# Altium PCB diffamp.PcbDoc
Units mil, origin at the board's own origin, x right, y up, seen from the top; angles counter-clockwise.
Board outline 900 x 1150.79 mil, 2 copper layers (Top Layer, Bottom Layer); 42 components, 33 nets, 125 pads, 42 vias.
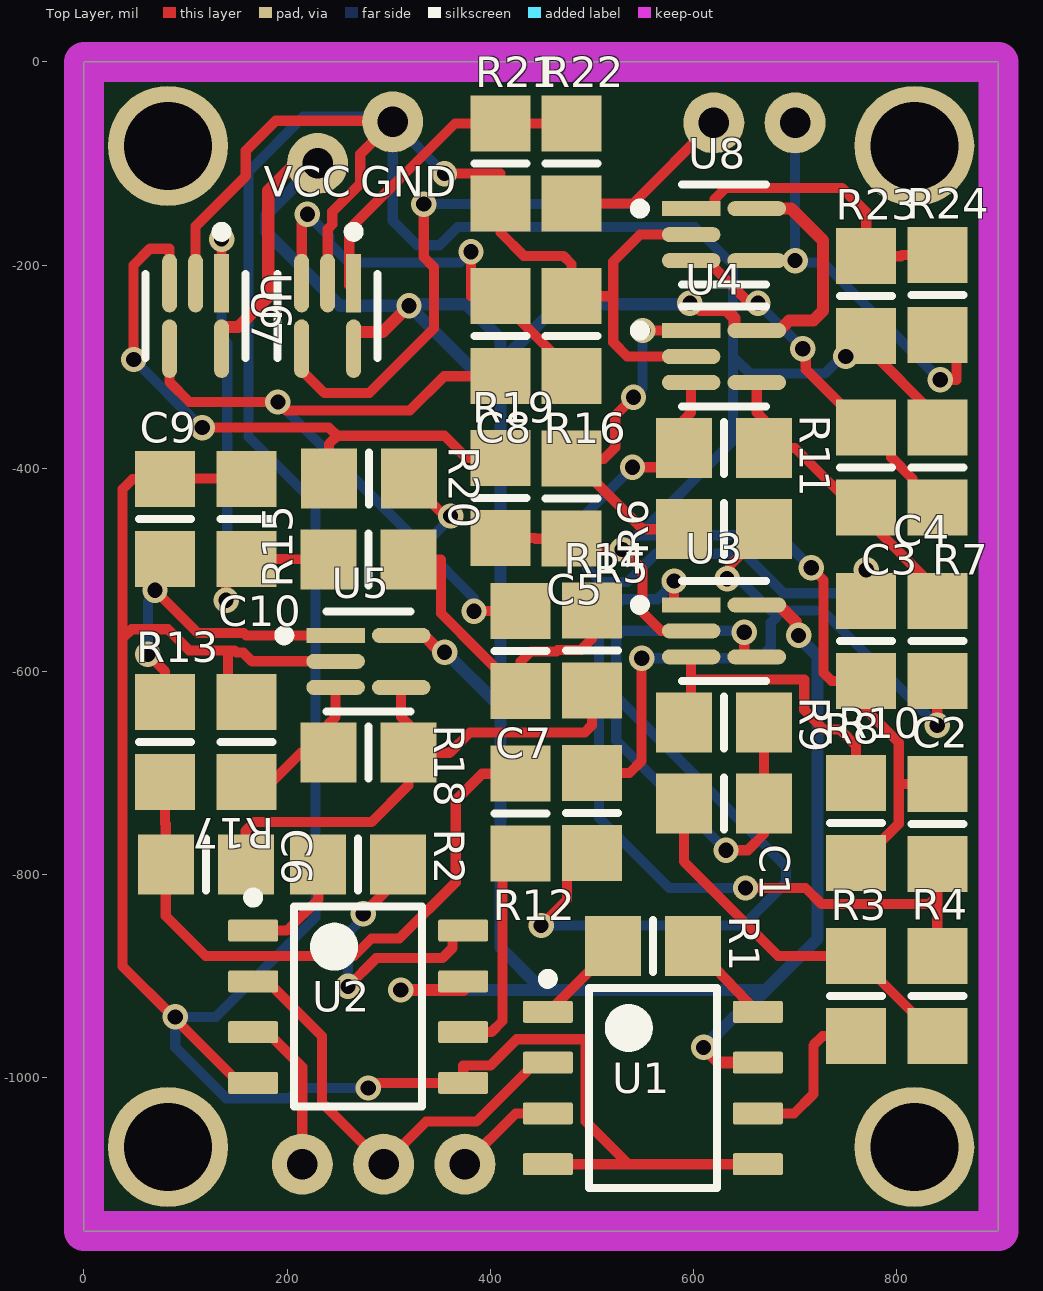
[diagram p0: Top Layer view]
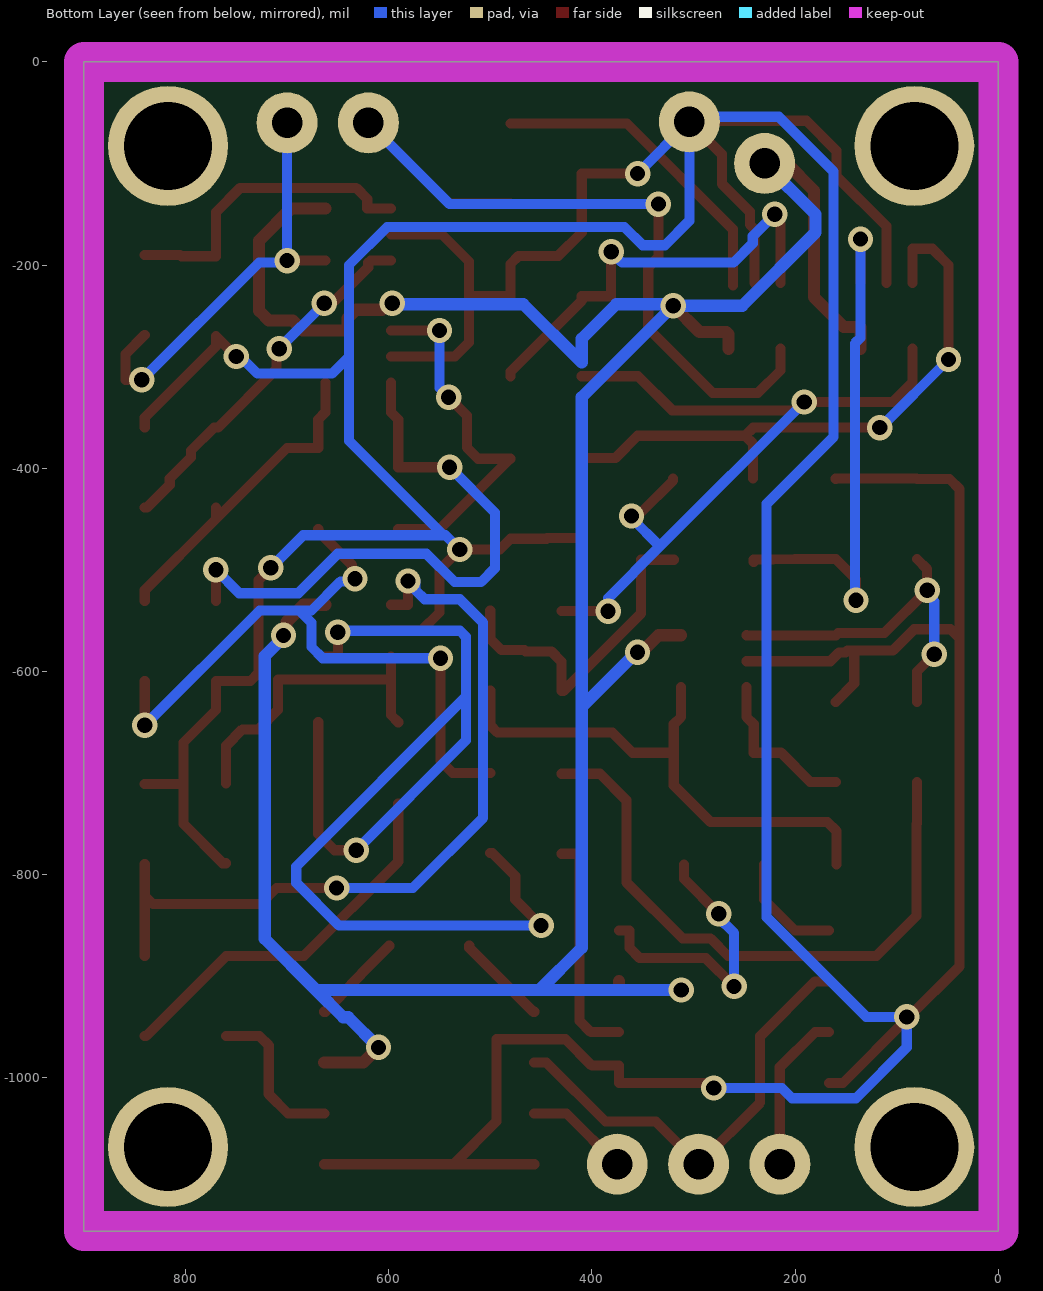
[diagram p1: Bottom Layer view, seen from below]

## Layer stack, top to bottom
Top Solder: solder mask 0.4, Solder Resist, Dk 3.5
Top Layer: signal copper 1.4
Dielectric 1: dielectric 12.6, FR-4, Dk 4.8
Bottom Layer: signal copper 1.4
Bottom Solder: solder mask 0.4, Solder Resist, Dk 3.5

## Board outline
0,-1150.79 900,-1150.79 900,0 0,0

## Design rules (kind name [scope] priority, off if disabled: settings)
Clearance [All] p1: gap=7 ignorepadtopadclearanceinfootprint=FALSE except(0: Arc-Hole Track-Hole SMDPad-Hole THPad-Hole Via-Hole Fill-Hole Poly-Hole Region-Hole Text-Hole; 5: SMDPad-SMDPad)
PolygonConnect [All] p1: connectstyle=Relief reliefconductorwidth=10 reliefentries=4 polygonreliefangle="90 Angle" airgapwidth=10
RoomDefinition diffamp [InComponentClass('diffamp')] p1: confinementstyle=ConfineIn formatcopy=TRUE lockcomponents=FALSE outline -97.64,-1226.38 1041.34,-1226.38 1041.34,92.91 -97.64,92.91
RoutingVias [All] p1: holewidth=15 width=25 viastyle="Through Hole" minholewidth=10 minwidth=20 maxholewidth=28 maxwidth=50
SolderMaskExpansion [All] p1: expansion=4 istentingtop=FALSE
Width [All] p1: maxlimit=20 minlimit=6 preferedwidth=10 minimp=50.000000 maximp=50.000000 favimp=50.000000
30 further rules are at their usual default settings.

## Components (designator, comment, footprint, x,y, rotation, side; value= is the part's Value field where it differs from the comment)
C1 "Cap" 6-0805_M 630,-730 r0 top value=1uF
C2 "Cap" 6-0805_M 840,-570 r90 top value=1uF
C3 "Cap" 6-0805_M 770,-399.37 r90 top value=1uF
C4 "Cap" 6-0805_M 840,-750 r90 top value=1uF
C5 "Cap" 6-0805_M 480,-430 r270 top value=1uF
C6 "Cap" 6-0805_M 120,-790 r0 top value=1uF
C7 "Cap" 6-0805_M 430,-580 r90 top value=1uF
C8 "Cap" 6-0805_M 410,-270 r90 top value=1uF
C9 "Cap" 6-0805_M 80,-450 r90 top value=1uF
C10 "Cap" 6-0805_M 160,-450 r90 top value=1uF
R1 "Res1" 6-0805_M 560,-870 r0 top value=5K
R2 "Res1" 6-0805_M 270,-790 r0 top value=5K
R3 "Res1" 6-0805_M 760,-919.37 r90 top value=330K
R4 "Res1" 6-0805_M 840,-919.37 r90 top value=330K
R5 "Res1" 6-0805_M 500,-739.37 r90 top value=330K
R6 "Res1" 6-0805_M 630,-460 r180 top value=330K
R7 "Res1" 6-0805_M 840,-399.37 r90 top value=1M
R8 "Res1" 6-0805_M 760,-749.37 r90 top value=10K
R9 "Res1" 6-0805_M 630,-650 r0 top value=100K
R10 "Res1" 6-0805_M 770,-570 r90 top value=10K
R11 "Res1" 6-0805_M 630,-380 r0 top value=100K
R12 "Res1" 6-0805_M 430,-740 r90 top value=330K
R13 "Res1" 6-0805_M 80,-669.37 r90 top value=330K
R14 "Res1" 6-0805_M 500,-579.37 r90 top value=330K
R15 "Res1" 6-0805_M 280,-490 r180 top value=330K
R16 "Res1" 6-0805_M 480,-270 r90 top value=1M
R17 "Res1" 6-0805_M 160,-669.37 r270 top value=10K
R18 "Res1" 6-0805_M 280,-680 r0 top value=100K
R19 "Res1" 6-0805_M 410,-429.37 r90 top value=10K
R20 "Res1" 6-0805_M 280.63,-410 r0 top value=100K
R21 "Res1" 6-0805_M 410,-100 r90 top value=10K
R22 "Res1" 6-0805_M 480,-100 r270 top value=100K
R23 "Res1" 6-0805_M 770,-230.63 r90 top value=10K
R24 "Res1" 6-0805_M 840,-229.37 r270 top value=100K
U1 "INA122UA" D0008A_L 560,-1010 r0 top
U2 "INA122UA" D0008A_L 270,-930 r0 top
U3 "LM321LVIDCKR" FP-DCK0005A-IPC_B 630,-560 r0 top
U4 "LM321LVIDCKR" FP-DCK0005A-IPC_B 630,-290 r0 top
U5 "LM321LVIDCKR" FP-DCK0005A-IPC_B 280,-590 r0 top
U6 "LM321LVIDCKR" FP-DCK0005A-IPC_B 110,-250 r270 top
U7 "LM321LVIDCKR" FP-DCK0005A-IPC_B 240,-250 r270 top
U8 "LM321LVIDCKR" FP-DCK0005A-IPC_B 630,-170 r0 top

## Footprints (in the part's own frame and the unit in brackets; to place one, negate y for a bottom-side part, rotate by r counter-clockwise, add the part's x,y. Pads: shape width x height; smd on the part's side, far side on the other; paste and mask are expansions set on the pad)
6-0805_M [mm] "Chip Resistor, Body 2.0x1.2mm, IPC Low Density"
  rect 1.4x1.5 smd: 1(-1,0) 2(1,0)
  silkscreen extent 0,-0.65 0,0.65, body extent -1.07,-0.7 1.07,0.7, height 0.7
D0008A_L [mm] "SOIC, 8-Leads, Body 5x4mm, Pitch 1.27mm, IPC High Density"
  rrect18% 1.25x0.55 smd: 1(-2.625,1.905) 2(-2.625,0.635) 3(-2.625,-0.635) 4(-2.625,-1.905) 5(2.625,-1.905) 6(2.625,-0.635) 7(2.625,0.635) 8(2.625,1.905)
  silkscreen extent -2.75,-2.5 1.6,2.85, body extent -3,-2.45 3,2.45, height 1.63
FP-DCK0005A-IPC_B [mm]
  rect 1.464x0.376 smd paste+0 mask+0: 1(-0.82,0.65)
  rrect100% 1.464x0.376 smd paste+0 mask+0: 2(-0.82,0) 3(-0.82,-0.65) 4(0.82,-0.65) 5(0.82,0.65)
  silkscreen extent -2.23,-1.25 1.05,1.25

## Part data
C1 C2 C3 C4 C5 C6 C7 C8 C9 C10: "Capacitor", LatestRevisionDate=17-Jul-2002, LatestRevisionNote="Re-released for DXP Platform.", PackageDescription="Radial Cap, Thru-Hole; 2 Leads; 0.3 in Pin Spacing", PackageReference=RAD-0.3, Published=8-Jun-2000, Publisher="Altium Limited"
R1 R2 R3 R4 R5 R6 R7 R8 R9 R10 R11 R12 R13 R14 R15 R16 R17 R18 R19 R20 R21 R22 R23 R24: "Resistor", LatestRevisionDate=17-Jul-2002, LatestRevisionNote="Re-released for DXP Platform.", PackageDescription="Axial Device, Thru-Hole; 2 Leads; 0.3 in Pin Spacing", PackageReference=AXIAL-0.3, Published=8-Jun-2000, Publisher="Altium Limited"
U1 U2: library part CMP-0944-00048-2, "Single Supply, MicroPower Instrumentation Amplifier, -40 to 85 degC, 8-pin SOIC (D8), Green (RoHS & no Sb/Br)", Input Bias Current (+/-)(Max)(nA)=50, Manufacturer="Texas Instruments", Quiescent Current (+/-)(Typ)(mA)=0.06, CMRR(Min)(dB)=76, Code_JEDEC=MS-012, ComponentLink1Description="Manufacturer URL", ComponentLink1URL=http://www.ti.com/, ComponentLink2Description=Datasheet, ComponentLink2URL=http://www.ti.com/general/docs/lit/getliterature.tsp?genericPartNumber=INA122&fileType=pdf, ComponentLink3Description="Package Specification", ComponentLink3URL=http://www.ti.com/litv/pdf/msoi002j, DatasheetVersion=SBOS069, Eco-Plan="Green (RoHS & no Sb/Br)", Gain(V/V)="5 to 10000", Input Offset (+/-)(Max)(uV)=500, Input Offset Drift (+/-)(Max)(uV/Degrees Celsius)=5, Mounting Technology="Surface Mount", Noise at 1kHz(Typ)(nV/rt(Hz))=60, Non-Linearity (+/-)(Max)(%)=0.024, Number of Channels=1, PackageDescription="8-Pin Plastic Small Outline, Body 4.9 x 3.9 mm, Pitch 1.27 mm", PackageReference=D0008A, PackageVersion="4040047-3/M, 06/2011", PartNumber=INA122UA, SubFamily="Single Supply", Vs(Max)(V)=36, Vs(Min)(V)=2.2
U3 U4 U5 U6 U7 U8: library part CMP-04895-000147-1, "IC OPAMP GP 1 CIRCUIT SC70-5", RoHS Compliant=Yes

## Free pads (board coordinates)
  round 118.11 hole 86.61: 15(82.68,-82.68) 16(817.32,-82.68) 17(82.68,-1068.11) 18(817.32,-1068.11)
  round 60 hole 30: 19(230,-100) 20(304,-59) 23(215,-1085) 24(295,-1085) 25(375,-1085) 26(620,-60) 27(700,-60)

## Via types
v1: diameter 25, hole 15, Top Layer to Bottom Layer, 42 vias

## Nets (pads, with @x,y where several pads share a name; then routed paths per layer and width w, separated by ;. In a path a pad name is that pad's centre, name@x,y a point inside that pad or via, vN(x,y) a via of type N, cw(c..) or ccw(c..) an arc to the next point about the centre after c; other vN are vias at no path point)
GND: C4.2 C5.2 C9.2 C10.2 pad.20 R7.2 R8.1 R10.1 R16.2 R17.1 R19.1 R21.1 R23.1 U1.4 U1.5 U2.4 U2.5 U3.2 U4.2 U5.2 U6.2 U7.2 U8.2 | length 5988.4
  Top Layer w10: U6.2 110,-161.85 159.37,-112.48 159.37,-87.36 188.73,-58 304,-58 pad.20 272,-91 272,-120 244.5,-147.5 244.5,-160.15 240,-164.65 240,-217.78 U7.2@237.78,-220 ; 139.2,-579.2 141.77,-581.77 141.77,-611.77 R17.1 ; C10.2 160,-410 80.63,-410 C9.2 48,-410.63 38,-420.63 38,-567.5 ; U2.4 152.87,-1005 90,-942.13 v1(90,-940) 87.88,-940 38,-890.12 38,-567.5 ; U5.2 165.35,-590 156.85,-581.5 150.46,-581.5 148.16,-579.2 103.46,-579.2 82.75,-558.5 47,-558.5 38,-567.5 ; v1(280,-1010) 284.06,-1010 289.06,-1005 U2.5 373.35,-988 400,-988 426,-962 494,-962 494,-1043 536,-1085 ; v1(355,-110) 410,-110 R21.1 410,-168 433,-191 472,-191 480,-199 R16.2 521,-230.63 ; R19.1 444,-468.74 444.63,-469.37 C5.2 490.63,-480 v1(530,-480) 550,-500 550,-542 568,-560 U3.2 ; U1.4 536,-1085 ; U4.2 534.89,-290 521,-276.11 521,-230.63 ; U8.2 547.47,-170 521,-196.47 521,-230.63 ; U1.5 536,-1085 ; v1(716,-498) 728,-510 728,-601.37 736,-609.37 R10.1 770,-638 802,-670 802,-710.63 ; v1(750,-290) R23.1 770,-280 840,-350 R7.2 ; R8.1 763.26,-788.74 802,-750 802,-710.63 ; C4.2 802,-710.63
  Bottom Layer w10: v1(280,-1010) 212.97,-1010 202.97,-1020 140,-1020 90,-970 v1(90,-940) 130,-940 228,-842 228,-435 162,-369 162,-108 216,-54 299,-54 pad.20 ; v1(355,-110) pad.20 ; v1(530,-480) 544,-466 ; v1(716,-498) 684,-466 546,-466 639,-373 639,-290 ; v1(750,-290) 745.94,-290 729.12,-306.82 655.82,-306.82 639,-290 ; pad.20 304,-156.5 328,-180.5 350,-180.5 368,-162.5 601.5,-162.5 639,-200 639,-290
NetC1_1: C1.1 R3.2 R4.1 | length 377.6
  Top Layer w10: C1.1 590.63,-787.2 683.43,-880 R3.2 838.74,-958.74 R4.1
NetC1_2: C1.2 R5.1 R9.2 U3.4 | length 1176.8
  Top Layer w10: v1(450,-850) 475.47,-824.53 475.47,-801.3 498.03,-778.74 R5.1 ; v1(632,-776) 653.37,-776 669.37,-760 C1.2 R9.2 ; v1(650,-561.31) 650,-583.37 652.22,-585.59 U3.4
  Bottom Layer w10: v1(450,-850) 649,-850 691,-808 691,-792 524,-625 ; v1(632,-776) 524,-668 524,-625 ; v1(650,-561.31) 648.69,-560 529.86,-560 524,-565.86 524,-625
NetC2_1: C2.1 R5.2 R6.1 | length 701.5
  Top Layer w10: R5.2 537,-700 549,-688 v1(549,-587) ; v1(633.11,-508.66) 635.98,-505.79 635.98,-495.36 669.37,-461.97 R6.1 ; v1(840,-653) C2.1
  Bottom Layer w10: v1(549,-587) 665,-587 676,-576 676,-552 688,-540 ; v1(633.11,-508.66) 635.98,-511.53 647.53,-511.53 676,-540 688,-540 ; v1(840,-653) 727,-540 688,-540
NetC2_2: C2.2 C3.1 R11.2 U4.4 | length 317.9
  Top Layer w10: U4.4 662.29,-344.92 669.37,-352 R11.2 700,-380 C3.1@770,-450 ; C3.1 C3.1@770,-450 ; C2.2 840,-520 C3.1@770,-450
NetC3_2: C3.2 R7.1 U8.3 | length 366.2
  Top Layer w10: U8.3 617.83,-195.59 620.05,-197.81 620.05,-202.2 652.46,-234.61 656.57,-234.61 660.98,-239.02 660.98,-240 v1(663.5,-237.48) ; v1(707.68,-282.32) 710.55,-285.19 710.55,-302.51 768.03,-360 771.97,-360 794.53,-382.56 794.53,-389.21 815.47,-410.16 815.47,-416.18 838.03,-438.74 R7.1
  Bottom Layer w10: v1(663.5,-237.48) 663.5,-237.81 707.68,-281.99 v1(707.68,-282.32)
NetC4_1: C4.1 R4.2 U3.1 | length 790.5
  Top Layer w10: v1(581,-511) 581,-534.41 U3.1 ; v1(651.21,-813.14) 710.34,-813.14 726.2,-829 832,-829 840,-821 ; R4.2 840,-821 ; C4.1 840,-821
  Bottom Layer w10: v1(581,-511) 573.5,-511 573.5,-520 564.5,-529 530,-529 507,-552 507,-744 576.14,-813.14 v1(651.21,-813.14)
NetC5_1: C5.1 R6.2 U4.1 | length 360.4
  Top Layer w10: C5.1 C5.1@480.63,-390.63 ; v1(541,-330) 523,-348 523,-379.63 512,-390.63 C5.1@480.63,-390.63 ; v1(550,-264.41) U4.1 ; R6.2 550,-460 C5.1@480.63,-390.63
  Bottom Layer w10: v1(541,-330) 550,-321 v1(550,-264.41)
NetC6_1: C6.1 R12.2 R13.1 | length 619.5
  Top Layer w10: R13.1 80,-749.37 80.63,-750 C6.1 80.63,-840.63 120,-880 265.96,-880 283.09,-862.87 310.56,-862.87 366,-807.43 366,-726.63 392,-700.63 R12.2
NetC6_2: C6.2 R14.1 R18.2 U5.4 | length 537.1
  Top Layer w10: C6.2 159.37,-756.93 168,-748.3 283.07,-748.3 319.37,-712 R18.2 ; U5.4 312.29,-644.92 319.37,-652 R18.2 ; R14.1 500,-653 493,-660 380,-660 360,-680 R18.2
NetC7_1: C7.1 R14.2 R15.1 | length 331.5
  Top Layer w10: R15.1 351.47,-490 351.47,-542.75 389.67,-581.01 428.03,-619.37 C7.1 430,-590.19 440,-580.19 465,-580.19 466.19,-579 489,-579 500,-568 R14.2
NetC7_2: C7.2 C8.1 R20.2 U6.4 | length 814.7
  Top Layer w10: U6.4 84.41,-315.24 104,-334.83 v1(191,-334.83) 199.17,-343 321,-343 354.63,-309.37 C8.1 ; R20.2 320,-411.97 352.1,-444.07 358.1,-444.07 v1(360.97,-446.94) ; v1(384,-540.63) C7.2
  Bottom Layer w10: v1(191,-334.83) 333.09,-476.91 ; v1(360.97,-446.94) 360.97,-449.03 333.09,-476.91 ; v1(384,-540.63) 384,-527.83 333.09,-476.91
NetC8_2: C8.2 R16.1 U7.3 | length 439.5
  Top Layer w10: U7.3 214.41,-159.65 220,-154.06 v1(220,-150) ; v1(381,-187) 381,-230.63 C8.2 410,-235 480,-305 R16.1
  Bottom Layer w10: v1(220,-150) 241.69,-171.69 241.69,-178.69 260.5,-197.5 370.5,-197.5 v1(381,-187)
NetC9_1: C9.1 R13.2 U5.1 | length 350.9
  Top Layer w10: v1(63,-583) 80,-600 R13.2 ; C9.1 70,-499.37 v1(70,-520) 112.2,-562.2 157.56,-562.2 159.85,-564.5 247.62,-564.5 U5.1
  Bottom Layer w10: v1(63,-583) 63,-531.06 70,-524.06 v1(70,-520)
NetC10_1: C10.1 R15.2 U6.1 | length 533.2
  Top Layer w10: U6.1 v1(135.59,-174.41) ; v1(140,-530) 140,-509.37 C10.1 200,-489.37 R15.2 R15.2@240.63,-491.97
  Bottom Layer w10: v1(135.59,-174.41) 135.59,-271.54 141.13,-277.08 141.13,-528.87 v1(140,-530)
NetR1_1: R1.1 U1.1 | length 92.1
  Top Layer w10: U1.1 457.6,-935 520.63,-871.97 R1.1
NetR1_2: R1.2 U1.8 | length 91.5
  Top Layer w10: R1.2 621.93,-892.56 662.4,-935 U1.8
NetR2_1: R2.1 U2.1 | length 111
  Top Layer w10: U2.1 200,-855 230.63,-824.37 R2.1
NetR2_2: R2.2 U2.8 | length 286.5
  Top Layer w10: v1(260,-910) 287.83,-882.17 352.83,-882.17 363,-872 363,-855 U2.8 ; v1(275,-838.37) 309.37,-804 R2.2
  Bottom Layer w10: v1(260,-910) 260,-857.43 275,-842.43 v1(275,-838.37)
NetR3_1: R3.1 U1.6 | length 156.4
  Top Layer w10: U1.6 699,-1035 718,-1016 718,-968 727.26,-958.74 R3.1
NetR8_2: R8.2 R9.1 U3.3 | length 311.1
  Top Layer w10: R9.1 597.71,-642.92 597.71,-608 ; U3.3 597.71,-608 ; R8.2 760,-673 744,-657 728,-657 709,-638 709,-608 597.71,-608
NetR10_2: R10.2 R11.1 U4.3 | length 602.8
  Top Layer w10: v1(540,-399) 590.63,-399 R11.1 590.63,-352 597.71,-344.92 U4.3 ; R10.2 v1(770,-500)
  Bottom Layer w10: v1(540,-399) 495.5,-443.5 495.5,-498.5 509,-512 535,-512 562.84,-484.16 650.16,-484.16 689,-523 747,-523 v1(770,-500)
NetR12_1: R12.1 U2.6 | length 225.8
  Top Layer w10: U2.6 401,-955 412,-944 412,-779.37 R12.1
NetR17_2: R17.2 R18.1 U5.3 | length 159.9
  Top Layer w10: R17.2 185,-708.74 213.74,-680 R18.1 240.63,-652 247.71,-644.92 U5.3
NetR19_2: R19.2 R20.1 U6.3 | length 615.2
  Top Layer w10: v1(49,-293) 49,-200 65,-184 84.41,-184 U6.3 ; v1(116.63,-360) 241.26,-360 249.26,-368 241.26,-376 R20.1 ; 248.63,-368 355,-368 377,-390 R19.2
  Bottom Layer w10: v1(49,-293) v1@116,-360
NetR21_2: R21.2 R22.1 U7.1 | length 317.2
  Top Layer w10: U7.1@261.18,-220 261.18,-164.82 365.37,-60.63 R21.2 R22.1
NetR22_2: pad.26 R22.2 U7.4 | length 805.2
  Top Layer w10: U7.4 214.41,-303.71 236.7,-326 281,-326 344.5,-262.5 344.5,-202.1 334.5,-192.1 v1(334.5,-140) ; R22.2 540.63,-139.37 pad.26
  Bottom Layer w10: v1(334.5,-140) 540,-140 pad.26
NetR23_2: R23.2 R24.1 U8.1 | length 310
  Top Layer w10: U8.1 621,-144.41 621,-135 632,-124 746,-124 770,-148 R23.2 804,-191.26 805.26,-190 R24.1
NetR24_2: pad.27 R24.2 U8.4 | length 433
  Top Layer w10: U8.4 v1(700,-195.59) ; R24.2 859,-287.74 859,-312.94 v1(842.94,-312.94)
  Bottom Layer w10: pad.27 v1(700,-195.59) 701.91,-197.5 727.5,-197.5 v1(842.94,-312.94)
NetU1_2: pad.24 U1.2 U2.2 | length 444.3
  Top Layer w10: U2.2 180.43,-905 234.38,-958.95 234.38,-1024.38 pad.24 337,-1043 386.61,-1043 444.61,-985 U1.2
NetU1_3: pad.25 U1.3 | length 102.4
  Top Layer w10: pad.25 425,-1035 U1.3
NetU2_3: pad.23 U2.3 | length 158.1
  Top Layer w10: U2.3 180.43,-955 215,-989.57 pad.23
VCC: pad.19 U1.7 U2.7 U3.5 U4.5 U5.5 U6.5 U7.5 U8.5 | length 3091
  Top Layer w12: U6.5 135.59,-261 152,-261 181.5,-231.5 181.5,-126.5 208,-100 pad.19 ; U7.5 265.59,-268.08 267.81,-265.87 294.13,-265.87 v1(320,-240) ; v1(312,-913.5) 373.35,-913.5 U2.7 ; U5.5 334.46,-564.41 350.62,-580.57 354.61,-580.57 v1(355.09,-581.05) ; v1(596.51,-237.51) 600.02,-237.51 606.52,-244.01 631.91,-244.01 640.33,-252.43 640.33,-263.12 641.62,-264.41 U4.5 684.46,-264.41 694.37,-254.5 718,-254.5 727.47,-245.03 727.47,-175.88 696,-144.41 U8.5 ; v1(610,-970) 625,-985 U1.7 ; U3.5 683.71,-534.41 700.63,-551.33 700.63,-561.63 v1(703.5,-564.5)
  Bottom Layer w12: pad.19 180,-150 180,-168 252,-240 v1(320,-240) ; v1(312,-913.5) 451.5,-913.5 ; v1(355.09,-581.05) 356.05,-581.05 410,-635 ; v1@596.51,-238.5 467.5,-238.5 410,-296 410,-272.5 376,-238.5 321.5,-238.5 v1(320,-240) ; v1(610,-970) 639.69,-940.31 644.69,-940.31 671.5,-913.5 ; v1(703.5,-564.5) 703.5,-566.39 722,-584.89 722,-863 671.5,-913.5 ; v1(320,-240) 410,-330 410,-635 ; 410,-635 410,-872 451.5,-913.5 ; 451.5,-913.5 671.5,-913.5

## Keep-outs
Keep-Out Layer:
  the board outline again, w39.37

## Silkscreen, mask and mechanical layers (free items; w line width, h text height)
Top Overlay:
  text "VCC" at 177,-133 h30
  text "GND" at 272,-133 h30